# Altium PCB PCB_Smart_FAN_Controller_RevA.PcbDoc
Units mm, origin at the board's own origin, x right, y up, seen from the top; angles counter-clockwise.
Board outline 25 x 10 mm, 2 copper layers (Top Layer, Bottom Layer); 36 components, 25 nets, 107 pads, 52 vias.
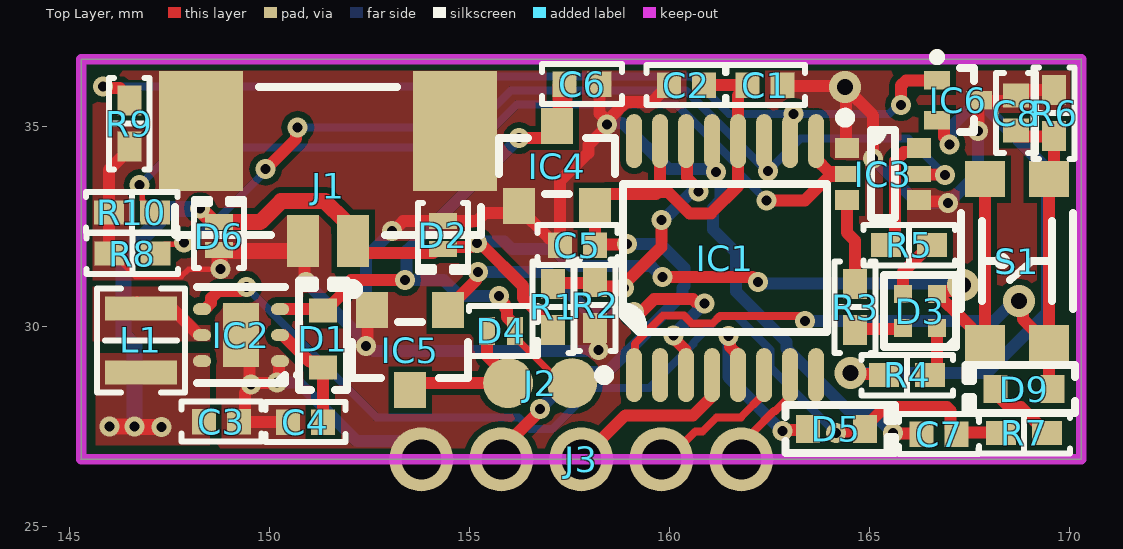
[diagram p0: Top Layer view]
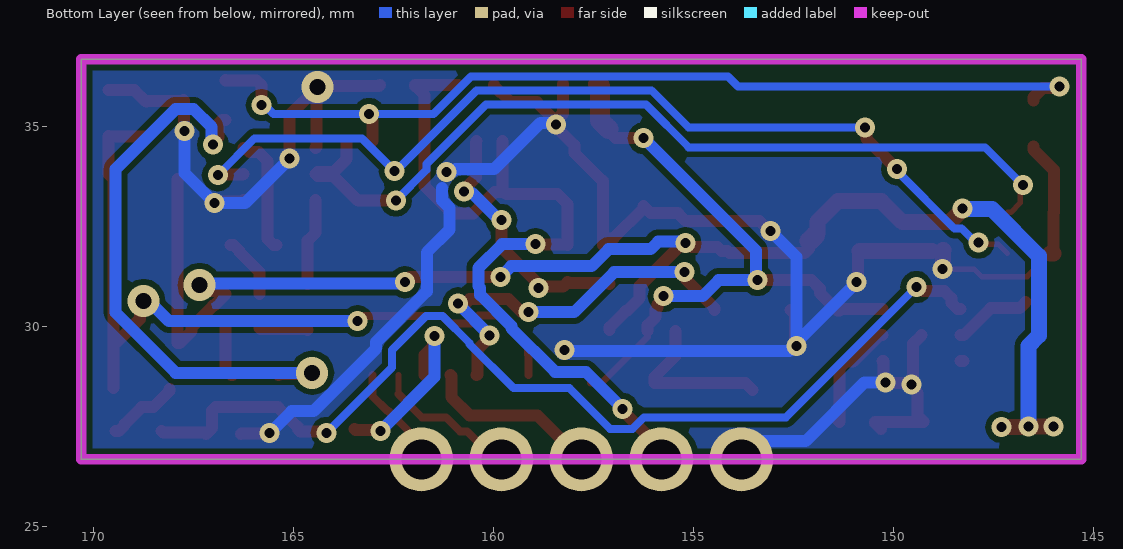
[diagram p1: Bottom Layer view, seen from below]

## Layer stack, top to bottom
Top Solder: solder mask 0.0102, Solder Resist, Dk 3.5
Top Layer: signal copper 0.0356
Dielectric 1: dielectric 0.32, FR-4, Dk 4.8
Bottom Layer: signal copper 0.0356
Bottom Solder: solder mask 0.0102, Solder Resist, Dk 3.5

## Board outline
145.307,26.67 170.307,26.67 170.307,36.67 145.307,36.67

## Design rules (kind name [scope] priority, off if disabled: settings)
Clearance [All] p1: gap=0.15 ignorepadtopadclearanceinfootprint=FALSE
ComponentClearance [All] p1: gap=0.15 collisioncheckmode=3 verticalgap=0.254 showdistances=FALSE
HoleToHoleClearance [All] p1: gap=0.2 allowstackedmicrovias=TRUE
MinimumSolderMaskSliver [All] p1: minsoldermaskwidth=0.1
PolygonConnect [All] p1: connectstyle=Direct reliefconductorwidth=0.254 reliefentries=4 polygonreliefangle="90 Angle" airgapwidth=0.254
RoutingVias [All] p1: holewidth=0.25 width=0.5 viastyle="Through Hole" minholewidth=0.25 minwidth=0.5 maxholewidth=2 maxwidth=3
SilkToSolderMaskClearance [IsPad] p1: minsilkscreentomaskgap=0 clearancetoexposedcopper=TRUE
SolderMaskExpansion [All] p1: expansion=0.102 istentingtop=FALSE
Width [All] p1: maxlimit=1 minlimit=0.135 preferedwidth=0.135
26 further rules are at their usual default settings.

## Classes and differential pairs
component class SCH5_Misc: C7 C8 D5 D9 J3 R6 R7 S1
component class SCH4_RGB_Indicator: D3 IC3 IC6 R3 R4 R5 R8 R9 R10
component class SCH3_Fan_Control: D4 IC5 J2
component class SCH2_Power: C3 C4 C5 C6 D1 D2 D6 IC2 IC4 J1 L1 R1 R2
component class SCH1_MCU: C1 C2 IC1

## Components (designator, comment, footprint, x,y, rotation, side; value= is the part's Value field where it differs from the comment)
C1 "0.1µF" "CAP 0402_1005" 162.4,36.025 r180 top
C2 "10000pF" "CAP 0402_1005" 160.435,36.025 r0 top
C3 "4.7µF" "CAP 0402_1005" 148.81,27.61 r180 top
C4 "4.7µF" "CAP 0402_1005" 150.91,27.6 r0 top
C5 "4.7µF" "CAP 0402_1005" 157.71,32.025 r0 top
C6 "1µF" "CAP 0402_1005" 157.825,36.05 r180 top
C7 "4.7µF" "CAP 0402_1005" 166.75,27.3 r0 top
C8 "0.1µF" "CAP 0402_1005" 168.675,35.325 r270 top
D1 "RBE05SM20AT2R" SOD-523 151.35,29.675 r90 top
D2 "DRTR5V0U1LPQ-7B" 0402 154.35,32.275 r270 top
D3 "Red, Green, Blue (RGB)" "Citizen CL-505S-X-SD-T" 166.275,30.375 r90 top
D4 "ESDSLC5V0L2B-TP" 0402 155.8,29.875 r0 top
D5 "RBE05SM20AT2R" SOD-523 164.185,27.425 r0 top
D6 "DRTR5V0U1LPQ-7B" 0402 148.75,32.25 r90 top
D9 "RBE05SM20AT2R" SOD-523 168.875,28.425 r180 top
IC1 "LPC802M011JDH20FP" "NXP TSSOP-16" 161.4,31.7 r90 top
IC2 "TPS61240IDRVRQ1" "TI WSON-6 DRV0006D 2x2MM" 149.3,29.775 r180 top
IC3 "2N7002BKS,115" "NXP SOT-363" 165.35,33.8 r0 top
IC4 "AP7313-33SRG-7" "DIODES SOT-23-3" 157.2,34 r90 top
IC5 "DMN1019USN-13" "DIODES SOT-23-3" 153.525,29.4 r270 top
IC6 "RE1C002UNTCL" "ROHM SC-89-SOT-490" 167.225,35.65 r0 top
J1 "BM02B-SRSS-TB(LF)(SN)" MOLX-53398-0271_V 151.475,33.5 r180 top
J2 "FAN" "FAN Connections" 157.575,28.575 r180 top
J3 "5 Cascalated Holes" "Cascalated Holes" 162.887,26.67 r180 top
L1 "1.5µH" "IND 0806_2016" 146.793,29.644 r90 top
R1 "33 kOhms" "RES 0402_1005" 157.1,30.475 r270 top
R2 "1 MOhms" "RES 0402_1005" 158.15,30.525 r90 top
R3 "240 Ohms" "RES 0402_1005" 164.65,30.475 r270 top
R4 "200 Ohms" "RES 0402_1005" 165.95,28.775 r0 top
R5 "200 Ohms" "RES 0402_1005" 166,32.025 r0 top
R6 "20 kOhms" "RES 0402_1005" 169.625,35.325 r270 top
R7 "200 kOhms" "RES 0402_1005" 168.875,27.325 r180 top
R8 "10 kOhms" "RES 0402_1005" 146.581,31.815 r0 top
R9 "10 kOhms" "RES 0402_1005" 146.507,35.065 r90 top
R10 "10 kOhms" "RES 0402_1005" 146.571,32.846 r0 top
S1 "KMR741NG ULC LFS" "C&K KMR7" 168.7,31.625 r90 top

## Footprints (in the part's own frame and the unit in brackets; to place one, negate y for a bottom-side part, rotate by r counter-clockwise, add the part's x,y. Pads: shape width x height; smd on the part's side, far side on the other; paste and mask are expansions set on the pad)
0402 [mm] "SODFL, 2-Leads, Body 0.675x1.075mm, IPC Medium Density"
  rect 0.4x0.7 smd: 1(-0.35,0) 2(0.35,0)
  silkscreen extent -0.8,-0.63 0.92,0.63, body extent -0.51,-0.31 0.5,0.3, height 0.45
"C&K KMR7" [mm] "T-Switch, 4-leads, body 4.2x2.8mm, C&K KMR741NG ULC LFS"
  rect 0.9x1 smd mask+0.1: 1(-2.05,0.8) 2(2.05,0.8) 3(-2.05,-0.8) 4(2.05,-0.8)
  silkscreen extent -1.2,-1.4 1.2,1.4, body extent -2.3,-1.4 2.3,1.4, height 2.5
"CAP 0402_1005" [mm] "Chip Capacitor, 2-Leads, Body 1.02x0.51mm, IPC Medium Density"
  rect 0.6x0.64 smd: 1(-0.44,0) 2(0.44,0)
  silkscreen extent -1,-0.5 1,0.5, body extent -0.5,-0.26 0.5,0.26, height 0.52
"Cascalated Holes" [mm] "Plated Through Hole: Hole Dia.=1.2mm Pad Dia.=2.0mm"
  round 1.6 hole 1: 1(1.08,0) 2(3.08,0) 3(5.08,0) 4(7.08,0) 5(9.08,0)
"Citizen CL-505S-X-SD-T" [mm] "4-Leads, Body 1.0x1.0mm"
  rect 0.45x0.45 smd mask+0: 1(-0.425,-0.425) 3(0.425,0.425)
  rect 0.45x0.45 smd paste+0 mask+0: 2(-0.425,0.425) 4(0.425,-0.425)
  silkscreen extent -0.9,-0.9 0.9,0.9, body extent -0.5,-0.5 0.5,0.5, height 0.26
"DIODES SOT-23-3" [mm] "SOT23, 3-Leads, Body 2.90x2.40mm, Pitch 0.95mm, IPC Medium Density"
  rect 0.9x0.8 smd: 1(-1,0.95) 2(-1,-0.95) 3(1,0)
  silkscreen extent -0.7,-1.45 0.7,1.45, body extent -1.41,-1.45 1.41,1.45, height 1.5
"FAN Connections" [mm]
  round 1.25 smd: 1(0,0) 2(1.6,0)
"IND 0806_2016" [mm] "Chip Capacitor, 2-Leads, Body 2.00x1.20mm, IPC Medium Density"
  rect 0.6x1.8 smd: 1(-0.8,0) 2(0.8,0)
  silkscreen extent -1.3,-1.1 1.3,1.1, body extent -1.01,-0.91 1.01,0.91, height 1.81
MOLX-53398-0271_V [mm] "Header, 2-Leads, Body 7.65x3.7mm, Pitch 1.25mm"
  rect 0.8x1.3 smd: 1(-0.625,1.375) 2(0.625,1.375)
  rect 2.1x3 smd: MP1(-3.175,-1.375) MP2(3.175,-1.375)
  silkscreen extent -3.82,-2.47 3.83,2.7, body extent -3.82,-2.49 3.83,1.71, height 4.72
"NXP SOT-363" [mm] "SOT363, 6-Leads, Body 2.00x2.10mm, Pitch 0.65mm, IPC Medium Density"
  rect 0.6x0.5 smd: 1(-0.9,0.65) 3(-0.9,-0.65) 4(0.9,-0.65) 6(0.9,0.65)
  rect 0.6x0.4 smd: 2(-0.9,0) 5(0.9,0)
  silkscreen extent -1.07,-1.1 0.3,1.53, body extent -1.06,-1.1 1.06,1.1, height 1.05
"NXP TSSOP-16" [mm] "TSSOP, 16-Leads, Body 5.00x4.40mm, Pitch 0.65mm, IPC Medium Density"
  oval 1.35x0.4 smd: 1(-2.925,2.275) 2(-2.925,1.625) 3(-2.925,0.975) 4(-2.925,0.325) 5(-2.925,-0.325) 6(-2.925,-0.975) 7(-2.925,-1.625) 8(-2.925,-2.275) 9(2.925,-2.275) 10(2.925,-1.625) 11(2.925,-0.975) 12(2.925,-0.325) 13(2.925,0.325) 14(2.925,0.975) 15(2.925,1.625) 16(2.925,2.275)
  silkscreen extent -3.05,-2.55 1.85,3.15, body extent -3.21,-2.5 3.21,2.5, height 1.1
"RES 0402_1005" [mm] "Chip Resistor, 2-Leads, Body 1.0x0.5mm, IPC Medium Density"
  rect 0.75x0.6 smd: 1(-0.575,0) 2(0.575,0)
  silkscreen extent -1.14,-0.51 1.14,0.51, body extent -0.5,-0.25 0.5,0.25, height 0.35
"ROHM SC-89-SOT-490" [mm] "SC-89(SOT-490), 3-Leads, Body 0.8x1.60mm, Pitch 0.50mm, IPC Medium Density"
  rect 0.65x0.46 smd: 1(-0.525,0.5) 2(0.525,0) 3(-0.525,-0.5)
  silkscreen extent -0.62,-0.8 0.4,1.17, body extent -0.8,-0.8 0.8,0.8, height 0.85
SOD-523 [mm] "Molded Diode, 2-Leads, Body 1.60x0.80mm, IPC Medium Density"
  rect 0.6x0.7 smd: 1(-0.71,0) 2(0.71,0)
  silkscreen extent -1.27,-0.6 1.47,0.6, body extent -0.8,-0.4 0.8,0.4, height 0.82
"TI WSON-6 DRV0006D 2x2MM" [mm] "SON, 6-Leads, Body 2.00x2.00mm, Pitch 0.65mm, Thermal Pad 1.60x0.89mm, IPC Medium Density"
  oval 0.45x0.3 smd: 1(-0.975,0.65) 2(-0.975,0) 3(-0.975,-0.65) 4(0.975,-0.65) 5(0.975,0) 6(0.975,0.65)
  rect 0.89x1.6 smd: 7(0,0)
  silkscreen extent -1.45,-1.2 1.1,1.2, body extent -1.05,-1.05 1.05,1.05, height 0.8

## Part data
C1 C8: library part CC0402KRX5R8BB104, "CAP CER 0.1UF 25V X5R 0402", Device Package="0402 (1005 Metric)", Manufacturer=Yageo, Operating Temperature="-55°C ~ 85°C", Supplier Part Number 1=311-1697-1-ND, Temperature Coefficient=X5R, Tolerance=±10%, Voltage - Rated=25V, Applications="General Purpose", Capacitance=0.1µF, ComponentLink1Description=Datasheet, ComponentLink1URL=https://www.yageo.com/upload/media/product/productsearch/datasheet/mlcc/UPY-GPHC_X5R_4V-to-50V_25.pdf, ComponentLink2Description="DigiKey Link", ComponentLink2URL=http://digikey.com/product-detail/en/yageo/CC0402KRX5R8BB104/311-1697-1-ND/5195599, LastUpdated="9/2/2020 1:01:34 AM", Lifecycle Status=Active, Minimum Order=1, Mounting Type="Surface Mount, MLCC", Package / Case="0402 (1005 Metric)", Packaging=TapeAndReel, Part Number=CC0402KRX5R8BB104, Part Status=Active, PartId=12727, Price=0.01, Series=CC, Size / Dimension="0.039\" L x 0.020\" W (1.00mm x 0.50mm)", Supplier 1=DigiKey, Thickness (Max)="0.022\" (0.55mm)"
C2: library part CGA2B2X5R1E103M050BA, "CAP CER 10000PF 25V X5R 0402", Device Package="0402 (1005 Metric)", Manufacturer="TDK Corporation", Operating Temperature="-55°C ~ 85°C", Ratings=AEC-Q200, Supplier Part Number 1=445-12174-1-ND, Temperature Coefficient=X5R, Tolerance=±20%, Voltage - Rated=25V, Applications=Automotive, Capacitance=10000pF, ComponentLink1Description=Datasheet, ComponentLink1URL=https://product.tdk.com/info/en/catalog/datasheets/mlcc_automotive_general_en.pdf?ref_disty=digikey, ComponentLink2Description="DigiKey Link", ComponentLink2URL=http://digikey.com/product-detail/en/tdk-corporation/CGA2B2X5R1E103M050BA/445-12174-1-ND/3953840, LastUpdated="9/2/2020 1:02:10 AM", Lifecycle Status=Active, Minimum Order=1, Mounting Type="Surface Mount, MLCC", Package / Case="0402 (1005 Metric)", Packaging=TapeAndReel, Part Number=CGA2B2X5R1E103M050BA, Part Status=Active, PartId=8092, Price=0.01, Series=CGA, Size / Dimension="0.039\" L x 0.020\" W (1.00mm x 0.50mm)", Supplier 1=DigiKey, Thickness (Max)="0.022\" (0.55mm)"
C3 C4 C5 C7: library part C1005X5R1A475K050BC, "CAP CER 4.7UF 10V X5R 0402", Device Package="0402 (1005 Metric)", Manufacturer="TDK Corporation", Operating Temperature="-55°C ~ 85°C", Supplier Part Number 1=445-13820-1-ND, Temperature Coefficient=X5R, Tolerance=±10%, Voltage - Rated=10V, Applications="General Purpose", Capacitance=4.7µF, ComponentLink1Description=Datasheet, ComponentLink1URL=https://product.tdk.com/info/en/catalog/datasheets/mlcc_commercial_general_en.pdf?ref_disty=digikey, ComponentLink2Description="DigiKey Link", ComponentLink2URL=http://digikey.com/product-detail/en/tdk-corporation/C1005X5R1A475K050BC/445-13820-1-ND/3955486, Features="Low ESL", LastUpdated="9/2/2020 1:02:25 AM", Lifecycle Status=Active, Minimum Order=1, Mounting Type="Surface Mount, MLCC", Package / Case="0402 (1005 Metric)", Packaging=TapeAndReel, Part Number=C1005X5R1A475K050BC, Part Status=Active, PartId=1759, Price=0.10, Series=C, Size / Dimension="0.039\" L x 0.020\" W (1.00mm x 0.50mm)", Supplier 1=DigiKey, Thickness (Max)="0.022\" (0.55mm)"
C6: library part JMK105C6105KV-F, "CAP CER 1UF 6.3V X6S 0402", Device Package="0402 (1005 Metric)", Manufacturer="Taiyo Yuden", Operating Temperature="-55°C ~ 105°C", Supplier Part Number 1=587-3381-1-ND, Temperature Coefficient=X6S, Tolerance=±10%, Voltage - Rated=6.3V, Applications="General Purpose", Capacitance=1µF, ComponentLink1Description=Datasheet, ComponentLink1URL=https://www.yuden.co.jp/productdata/catalog/mlcc01_e.pdf, ComponentLink2Description="DigiKey Link", ComponentLink2URL=http://digikey.com/product-detail/en/taiyo-yuden/JMK105C6105KV-F/587-3381-1-ND/4157200, LastUpdated="9/2/2020 1:01:39 AM", Lifecycle Status=Active, Minimum Order=1, Mounting Type="Surface Mount, MLCC", Package / Case="0402 (1005 Metric)", Packaging=TapeAndReel, Part Number=JMK105C6105KV-F, Part Status=Active, PartId=12563, Price=0.01, Series=M, Size / Dimension="0.039\" L x 0.020\" W (1.00mm x 0.50mm)", Supplier 1=DigiKey, Thickness (Max)="0.022\" (0.55mm)"
D1 D5 D9: "DIODE SCHOTTKY 20V 500MA EMD2", Current - Average Rectified (Io)=500mA, Current - Reverse Leakage @ Vr="150µA @ 20V", Manufacturer="Rohm Semiconductor", Operating Temperature - Junction="150°C (Max)", Package / Case="SC-79, SOD-523", Supplier Device Package=EMD2, Supplier Part Number 1=RBE05SM20AT2RTR-ND, Voltage - DC Reverse (Vr) (Max)=20V, Voltage - Forward (Vf) (Max) @ If="530mV @ 500mA", ComponentLink1Description=Datasheet, ComponentLink1URL=https://www.rohm.com/datasheet/RBE05SM20A/rbe05sm20at2r-e, ComponentLink2Description="DigiKey Link", ComponentLink2URL=http://digikey.com/product-detail/en/rohm-semiconductor/RBE05SM20AT2R/RBE05SM20AT2RTR-ND/5721257, Diode Type=Schottky, LastUpdated="9/2/2020 1:23:19 AM", Lifecycle Status=Active, Minimum Order=0, Mounting Type="Surface Mount", Packaging=TapeAndReel, Part Number=RBE05SM20AT2R, Part Status=Active, PartId=2802, Price=0.05, Series=-, Speed="Fast Recovery =< 500ns, > 200mA (Io)", Supplier 1=DigiKey
D2 D6: "DATALINE PROTECT PP X1-DFN1006-2", Capacitance @ Frequency="1pF @ 1MHz", Current - Peak Pulse (10/1000µs)="5A (8/20µs)", Device Package="0402 (1006 Metric)", Manufacturer="Diodes Incorporated", Operating Temperature="-55°C ~ 150°C (TJ)", Power Line Protection=No, Supplier Device Package=X1-DFN1006-2, Supplier Part Number 1=31-DRTR5V0U1LPQ-7BCT-ND, Voltage - Breakdown (Min)=6V, Voltage - Clamping (Max) @ Ipp=10V, Voltage - Reverse Standoff (Typ)="5.5V (Max)", Applications=Automotive, ComponentLink1Description=Datasheet, ComponentLink1URL=https://www.diodes.com/assets/Datasheets/DRTR5V0U1LPQ.pdf, ComponentLink2Description="DigiKey Link", ComponentLink2URL=http://digikey.com/product-detail/en/diodes-incorporated/DRTR5V0U1LPQ-7B/31-DRTR5V0U1LPQ-7BCT-ND/10674185, LastUpdated="9/2/2020 1:28:45 AM", Lifecycle Status=Active, Minimum Order=1, Mounting Type="Surface Mount", Package / Case="0402 (1006 Metric)", Packaging=Unknown, Part Number=DRTR5V0U1LPQ-7B, Part Status=Active, PartId=10375, Price=0.04, Series="Automotive, AEC-Q101", Supplier 1=DigiKey, Type=Zener, Unidirectional Channels=1
D3: library part CL-505S-X-SD-T, "LED TRI TOP FIRING 1.0 X 1.0", Current - Test="5mA Red, 5mA Green, 5mA Blue", Device Package="0404 (1010 Metric)", Lens Color=0.26mm, Manufacturer=Citizen, Millicandela Rating="40mcd Red, 220mcd Green, 65mcd Blue", Supplier Part Number 1=1642-1510-1-ND, Voltage - Forward (Vf) (Typ)="1.85V Red, 2.7V Green, 2.75V Blue", Color="Red, Green, Blue (RGB)", ComponentLink1Description=Datasheet, ComponentLink1URL=http://ce.citizen.co.jp/up_img/product/sQNrj4RlM7o2/CL-505S_e.pdf, ComponentLink2Description="DigiKey Link", ComponentLink2URL=http://digikey.com/product-detail/en/citizen/CL-505S-X-SD-T/1642-1510-1-ND/6005950, Configuration="Common Anode", Height (Max)=0.26mm, LastUpdated="3/19/2020 10:25:23 PM", Lens Size=1.00mm, Lens Style="Square with Flat Top", Lifecycle Status=Active, Minimum Order=1, Mounting Type="Surface Mount", Package / Case="0404 (1010 Metric)", Packaging=TapeAndReel, Part Number=CL-505S-X-SD-T, Part Status=Active, PartId=955, Price=0.23, Series=CL-505S, Size / Dimension="1.00mm L x 1.00mm W", Supplier 1=DigiKey, Wavelength - Dominant="615nm Red, 530nm Green, 470nm Blue"
D4: "5.5V, ESD PROTECTION DEVICES, DF", Capacitance @ Frequency="0.15pF @ 1MHz", Current - Peak Pulse (10/1000µs)="3A (8/20µs)", Manufacturer="Micro Commercial Co", Operating Temperature="-55°C ~ 150°C (TJ)", Package / Case="0402 (1006 Metric)", Power - Peak Pulse=40W, Power Line Protection=No, Supplier Device Package=DFN1006-2L, Supplier Part Number 1=353-ESDSLC5V0L2B-TPCT-ND, Voltage - Breakdown (Min)=6.5V, Voltage - Clamping (Max) @ Ipp=15V, Voltage - Reverse Standoff (Typ)="5.5V (Max)", Applications="General Purpose", Bidirectional Channels=1, ComponentLink1Description=Datasheet, ComponentLink1URL=https://mccsemi.com/pdf/Products/ESDSLC5V0L2B(DFN1006-2L)-V1.pdf, ComponentLink2Description="DigiKey Link", ComponentLink2URL=http://digikey.com/product-detail/en/micro-commercial-co/ESDSLC5V0L2B-TP/353-ESDSLC5V0L2B-TPCT-ND/12177299, LastUpdated="8/30/2020 9:08:11 PM", Lifecycle Status=Active, Minimum Order=1, Mounting Type="Surface Mount", Packaging=Unknown, Part Number=ESDSLC5V0L2B-TP, PartId=11464, Price=0.03, Supplier 1=DigiKey, Type=Zener
IC1: library part "NXP LPC802 16PIN", "Integrated CIrcuit", Price=1.45
IC2: "IC REG BOOST 5V 500MA 6SON", Current - Output="500mA (Switch)", Frequency - Switching=3.5MHz, Manufacturer="Texas Instruments", Operating Temperature="-40°C ~ 85°C (TA)", Package / Case="6-WDFN Exposed Pad", Supplier Device Package="6-SON (2x2)", Supplier Part Number 1=296-28184-1-ND, Voltage - Input (Max)=5.5V, Voltage - Input (Min)=2.3V, Voltage - Output (Min/Fixed)=5V, ComponentLink1Description=Datasheet, ComponentLink1URL=http://www.ti.com/general/docs/suppproductinfo.tsp?distId=10&gotoUrl=http%3A%2F%2Fwww.ti.com%2Flit%2Fgpn%2Ftps61240-q1, ComponentLink2Description="DigiKey Link", ComponentLink2URL=http://digikey.com/product-detail/en/texas-instruments/TPS61240IDRVRQ1/296-28184-1-ND/2522312, Function=Step-Up, LastUpdated="9/13/2020 11:04:11 AM", Lifecycle Status=Active, Minimum Order=1, Mounting Type="Surface Mount", Number of Outputs=1, Output Configuration=Positive, Output Type=Fixed, Packaging=TapeAndReel, Part Number=TPS61240IDRVRQ1, Part Status=Active, Price=0.73, Series="Automotive, AEC-Q100", Supplier 1=DigiKey, Synchronous Rectifier=Yes, Topology=Boost
IC3: "MOSFET 2N-CH 60V 0.3A 6TSSOP", Current - Continuous Drain (Id) @ 25°C=300mA, Drain to Source Voltage (Vdss)=60V, Input Capacitance (Ciss) (Max) @ Vds="50pF @ 10V", Manufacturer="Nexperia USA Inc.", Operating Temperature="150°C (TJ)", Package / Case="6-TSSOP, SC-88, SOT-363", Power - Max=295mW, Supplier Device Package=6-TSSOP, Supplier Part Number 1=1727-4786-1-ND, ComponentLink1Description=Datasheet, ComponentLink1URL=https://assets.nexperia.com/documents/data-sheet/2N7002BKS.pdf, ComponentLink2Description="DigiKey Link", ComponentLink2URL=http://digikey.com/product-detail/en/nexperia-usa-inc/2N7002BKS115/1727-4786-1-ND/2531264, FET Feature="Logic Level Gate", FET Type="2 N-Channel (Dual)", Gate Charge (Qg) (Max) @ Vgs="0.6nC @ 4.5V", LastUpdated="9/2/2020 1:29:59 AM", Lifecycle Status=Active, Minimum Order=1, Mounting Type="Surface Mount", Packaging=TapeAndReel, Part Number=2N7002BKS,115, Part Status=Active, Price=0.08, Rds On (Max) @ Id, Vgs="1.6Ohm @ 500mA, 10V", Series="Automotive, AEC-Q101, TrenchMOS™", Supplier 1=DigiKey, Vgs(th) (Max) @ Id="2.1V @ 250µA"
IC4: "IC REG LIN 3.3V 150MA SOT23R-3", Current - Output=150mA, Current - Quiescent (Iq)=75µA, Current - Supply (Max)=85µA, Manufacturer="Diodes Incorporated", Operating Temperature="-40°C ~ 85°C", Package / Case="TO-236-3, SC-59, SOT-23-3", Supplier Device Package=SOT-23R-3, Supplier Part Number 1=AP7313-33SRG-7DICT-ND, Voltage - Input (Max)=6V, Voltage - Output (Min/Fixed)=3.3V, Voltage Dropout (Max)="0.3V @ 150mA", ComponentLink1Description=Datasheet, ComponentLink1URL=https://www.diodes.com/assets/Datasheets/AP7313.pdf, ComponentLink2Description="DigiKey Link", ComponentLink2URL=http://digikey.com/product-detail/en/diodes-incorporated/AP7313-33SRG-7/AP7313-33SRG-7DICT-ND/2270841, LastUpdated="9/2/2020 1:24:50 AM", Lifecycle Status=Active, Minimum Order=1, Mounting Type="Surface Mount", Number of Regulators=1, Output Configuration=Positive, Output Type=Fixed, Packaging=TapeAndReel, Part Number=AP7313-33SRG-7, Part Status=Active, Price=0.09, Protection Features="Over Current, Over Temperature, Short Circuit", PSRR="65dB (100Hz)", Series=-, Supplier 1=DigiKey
IC5: "MOSFET N-CH 12V 9.3A SC59", Current - Continuous Drain (Id) @ 25°C="9.3A (Ta)", Drain to Source Voltage (Vdss)=12V, Drive Voltage (Max Rds On,  Min Rds On)="1.2V, 2.5V", Input Capacitance (Ciss) (Max) @ Vds="2426pF @ 10V", Manufacturer="Diodes Incorporated", Operating Temperature="-55°C ~ 150°C (TJ)", Package / Case="TO-236-3, SC-59, SOT-23-3", Power Dissipation (Max)="680mW (Ta)", Supplier Device Package=SC-59, Supplier Part Number 1=DMN1019USN-13DICT-ND, ComponentLink1Description=Datasheet, ComponentLink1URL=https://www.diodes.com/assets/Datasheets/DMN1019USN.pdf, ComponentLink2Description="DigiKey Link", ComponentLink2URL=http://digikey.com/product-detail/en/diodes-incorporated/DMN1019USN-13/DMN1019USN-13DICT-ND/4898885, FET Type=N-Channel, Gate Charge (Qg) (Max) @ Vgs="50.6nC @ 8V", LastUpdated="9/2/2020 1:25:02 AM", Lifecycle Status=Active, Minimum Order=1, Mounting Type="Surface Mount", Packaging=TapeAndReel, Part Number=DMN1019USN-13, Part Status=Active, Price=0.10, Rds On (Max) @ Id, Vgs="10mOhm @ 9.7A, 4.5V", Series=-, Supplier 1=DigiKey, Technology="MOSFET (Metal Oxide)", Vgs (Max)=±8V, Vgs(th) (Max) @ Id="800mV @ 250µA"
IC6: "MOSFET N-CH 20V 0.2A EMT3", Current - Continuous Drain (Id) @ 25°C="200mA (Ta)", Drain to Source Voltage (Vdss)=20V, Drive Voltage (Max Rds On,  Min Rds On)="1.2V, 2.5V", Input Capacitance (Ciss) (Max) @ Vds="25pF @ 10V", Manufacturer="Rohm Semiconductor", Operating Temperature="150°C (TJ)", Package / Case="SC-89, SOT-490", Power Dissipation (Max)="150mW (Ta)", Supplier Device Package="EMT3F (SOT-416FL)", Supplier Part Number 1=RE1C002UNTCLCT-ND, ComponentLink1Description=Datasheet, ComponentLink1URL=https://www.rohm.com/datasheet/RE1C002UN/re1c002untcl-e, ComponentLink2Description="DigiKey Link", ComponentLink2URL=http://digikey.com/product-detail/en/rohm-semiconductor/RE1C002UNTCL/RE1C002UNTCLCT-ND/5042535, FET Type=N-Channel, LastUpdated="9/2/2020 1:30:13 AM", Lifecycle Status=Active, Minimum Order=1, Mounting Type="Surface Mount", Packaging=TapeAndReel, Part Number=RE1C002UNTCL, Part Status=Active, Price=0.03, Rds On (Max) @ Id, Vgs="1.2Ohm @ 100mA, 2.5V", Series=-, Supplier 1=DigiKey, Technology="MOSFET (Metal Oxide)", Vgs (Max)=±8V, Vgs(th) (Max) @ Id="1V @ 1mA"
J1: "CONN HEADER SMD 2POS 1MM", Current Rating (Amps)=0.7A, Insulation Color=Natural, Manufacturer="JST Sales America Inc.", Material Flammability Rating="UL94 V-0", Operating Temperature="-25°C ~ 85°C", Supplier Part Number 1=455-1788-1-ND, Voltage Rating=50V, ComponentLink1Description=Datasheet, ComponentLink1URL=http://www.jst-mfg.com/product/pdf/eng/eSR.pdf, ComponentLink2Description="DigiKey Link", ComponentLink2URL=http://digikey.com/product-detail/en/jst-sales-america-inc/BM02B-SRSS-TB-LF-SN/455-1788-1-ND/926859, Connector Type=Header, Contact Finish - Mating=Tin, Contact Finish - Post=Tin, Contact Material="Copper Alloy", Contact Shape=Square, Contact Type="Male Pin", Fastening Type=Push-Pull, Features="Solder Retention", Insulation Height="0.167\" (4.25mm)", Insulation Material="Polyamide (PA), Nylon", LastUpdated="1/12/2020 10:11:04 PM", Lifecycle Status=Active, Minimum Order=1, Mounting Type="Surface Mount", Number of Positions=2, Number of Positions Loaded=All, Number of Rows=1, Packaging=TapeAndReel, Part Number=BM02B-SRSS-TB(LF)(SN), Part Status=Active, PartId=12, Pitch - Mating="0.039\" (1.00mm)", Price=0.22, Series=SR, Shrouding="Shrouded - 4 Wall", Style="Board to Cable/Wire", Supplier 1=DigiKey, Termination=Solder
J2: library part "FAN Connection", "Fan Connection Test Points", LatestRevisionDate=17-Jul-2002, LatestRevisionNote="Re-released for DXP Platform.", Publisher="Altium Limited"
J3: library part "Cascalated Holes", LatestRevisionDate=17-Jul-2002, LatestRevisionNote="Re-released for DXP Platform.", Publisher="Altium Limited"
L1: library part LQH2MCN1R5M52L, "FIXED IND 1.5UH 540MA 330 MOHM", Current Rating (Amps)=540mA, DC Resistance (DCR)="429mOhm Max", Device Package="0806 (2016 Metric)", Frequency - Self Resonant=165MHz, Inductance Frequency - Test=1MHz, Manufacturer="Murata Electronics", Operating Temperature="-40°C ~ 85°C", Supplier Part Number 1=490-4985-1-ND, Tolerance=±20%, ComponentLink1Description=Datasheet, ComponentLink1URL=https://search.murata.co.jp/Ceramy/image/img/P02/JELF243A-0060.pdf, ComponentLink2Description="DigiKey Link", ComponentLink2URL=http://digikey.com/product-detail/en/murata-electronics/LQH2MCN1R5M52L/490-4985-1-ND/1788283, Height - Seated (Max)="0.037\" (0.95mm)", Inductance=1.5µH, LastUpdated="9/2/2020 1:24:34 AM", Lifecycle Status=Active, Material - Core=Ferrite, Minimum Order=1, Mounting Type="Surface Mount", Package / Case="0806 (2016 Metric)", Packaging=TapeAndReel, Part Number=LQH2MCN1R5M52L, Part Status=Active, PartId=3084, Price=0.14, Series=LQH2, Shielding=Unshielded, Size / Dimension="0.079\" L x 0.063\" W (2.00mm x 1.60mm)", Supplier 1=DigiKey, Supplier Device Package="0806 (2016 Metric)", Type=Wirewound
R1: library part RR0510P-333-D, "RES SMD 33K OHM 0.5% 1/16W 0402", Device Package="0402 (1005 Metric)", Manufacturer=Susumu, Operating Temperature="-55°C ~ 125°C", Power (Watts)="0.063W, 1/16W", Supplier Part Number 1=RR05P33.0KDCT-ND, Temperature Coefficient=±25ppm/°C, Tolerance=±0.5%, ComponentLink1Description=Datasheet, ComponentLink1URL=http://www.susumu.co.jp/common/pdf/n_catalog_partition05_en.pdf, ComponentLink2Description="DigiKey Link", ComponentLink2URL=http://digikey.com/product-detail/en/susumu/RR0510P-333-D/RR05P33.0KDCT-ND/432971, Composition="Thin Film", Height - Seated (Max)="0.016\" (0.40mm)", LastUpdated="9/2/2020 1:08:09 AM", Lifecycle Status=Active, Minimum Order=1, Number of Terminations=2, Package / Case="0402 (1005 Metric)", Packaging=TapeAndReel, Part Number=RR0510P-333-D, Part Status=Active, PartId=3295, Price=0.01, Resistance="33 kOhms", Series=RR, Size / Dimension="0.039\" L x 0.020\" W (1.00mm x 0.50mm)", Supplier 1=DigiKey
R2: library part CRCW04021M00FKTD, "RES SMD 1M OHM 1% 1/16W 0402", Device Package="0402 (1005 Metric)", Manufacturer="Vishay Dale", Operating Temperature="-55°C ~ 155°C", Power (Watts)="0.063W, 1/16W", Ratings=AEC-Q200, Supplier Device Package=0402, Supplier Part Number 1=541-CRCW04021M00FKTDCT-ND, Temperature Coefficient=±100ppm/°C, Tolerance=±1%, ComponentLink1Description=Datasheet, ComponentLink1URL=http://www.vishay.com/docs/20008/dcrcw.pdf, ComponentLink2Description="DigiKey Link", ComponentLink2URL=http://digikey.com/product-detail/en/vishay-dale/CRCW04021M00FKTD/541-CRCW04021M00FKTDCT-ND/11500836, Composition="Thick Film", Features="Automotive AEC-Q200", LastUpdated="9/2/2020 1:07:22 AM", Lifecycle Status=Active, Minimum Order=1, Number of Terminations=2, Package / Case="0402 (1005 Metric)", Packaging=TapeAndReel, Part Number=CRCW04021M00FKTD, PartId=56877, Price=0.01, Resistance="1 MOhms", Series=CRCW, Supplier 1=DigiKey
R3: library part RR0510P-241-D, "RES SMD 240 OHM 0.5% 1/16W 0402", Device Package="0402 (1005 Metric)", Manufacturer=Susumu, Operating Temperature="-55°C ~ 125°C", Power (Watts)="0.063W, 1/16W", Supplier Part Number 1=RR05P240DCT-ND, Temperature Coefficient=±25ppm/°C, Tolerance=±0.5%, ComponentLink1Description=Datasheet, ComponentLink1URL=http://www.susumu.co.jp/common/pdf/n_catalog_partition05_en.pdf, ComponentLink2Description="DigiKey Link", ComponentLink2URL=http://digikey.com/product-detail/en/susumu/RR0510P-241-D/RR05P240DCT-ND/432922, Composition="Thin Film", Height - Seated (Max)="0.016\" (0.40mm)", LastUpdated="9/2/2020 1:08:09 AM", Lifecycle Status=Active, Minimum Order=1, Number of Terminations=2, Package / Case="0402 (1005 Metric)", Packaging=TapeAndReel, Part Number=RR0510P-241-D, Part Status=Active, PartId=3287, Price=0.01, Resistance="240 Ohms", Series=RR, Size / Dimension="0.039\" L x 0.020\" W (1.00mm x 0.50mm)", Supplier 1=DigiKey
R4 R5: library part RR0510P-201-D, "RES SMD 200 OHM 0.5% 1/16W 0402", Device Package="0402 (1005 Metric)", Manufacturer=Susumu, Operating Temperature="-55°C ~ 125°C", Power (Watts)="0.063W, 1/16W", Supplier Part Number 1=RR05P200DCT-ND, Temperature Coefficient=±25ppm/°C, Tolerance=±0.5%, ComponentLink1Description=Datasheet, ComponentLink1URL=http://www.susumu.co.jp/common/pdf/n_catalog_partition05_en.pdf, ComponentLink2Description="DigiKey Link", ComponentLink2URL=http://digikey.com/product-detail/en/susumu/RR0510P-201-D/RR05P200DCT-ND/432920, Composition="Thin Film", Height - Seated (Max)="0.016\" (0.40mm)", LastUpdated="9/2/2020 1:08:09 AM", Lifecycle Status=Active, Minimum Order=1, Number of Terminations=2, Package / Case="0402 (1005 Metric)", Packaging=TapeAndReel, Part Number=RR0510P-201-D, Part Status=Active, PartId=3269, Price=0.01, Resistance="200 Ohms", Series=RR, Size / Dimension="0.039\" L x 0.020\" W (1.00mm x 0.50mm)", Supplier 1=DigiKey
R6: library part RG1005P-203-D-T10, "RES SMD 20K OHM 0.5% 1/16W 0402", Device Package="0402 (1005 Metric)", Manufacturer=Susumu, Operating Temperature="-55°C ~ 155°C", Power (Watts)="0.063W, 1/16W", Ratings=AEC-Q200, Supplier Device Package=0402, Supplier Part Number 1=408-1674-1-ND, Temperature Coefficient=±25ppm/°C, Tolerance=±0.5%, ComponentLink1Description=Datasheet, ComponentLink1URL=http://www.susumu.co.jp/common/pdf/n_catalog_partition01_en.pdf, ComponentLink2Description="DigiKey Link", ComponentLink2URL=http://digikey.com/product-detail/en/susumu/RG1005P-203-D-T10/408-1674-1-ND/1288043, Composition="Thin Film", Features="Anti-Sulfur, Automotive AEC-Q200", Height - Seated (Max)="0.016\" (0.40mm)", LastUpdated="9/2/2020 1:07:34 AM", Lifecycle Status=Active, Minimum Order=1, Number of Terminations=2, Package / Case="0402 (1005 Metric)", Packaging=TapeAndReel, Part Number=RG1005P-203-D-T10, Part Status=Active, PartId=18569, Price=0.01, Resistance="20 kOhms", Series=RG, Size / Dimension="0.039\" L x 0.020\" W (1.00mm x 0.50mm)", Supplier 1=DigiKey
R7: library part ERJ-PA2J204X, "RES SMD 200 KOHM 5% 1/5W 0402", Device Package="0402 (1005 Metric)", Manufacturer="Panasonic Electronic Components", Operating Temperature="-55°C ~ 155°C", Power (Watts)="0.2W, 1/5W", Ratings=AEC-Q200, Supplier Device Package=0402, Supplier Part Number 1=P124546CT-ND, Temperature Coefficient=±200ppm/°C, Tolerance=±5%, ComponentLink1Description=Datasheet, ComponentLink1URL=https://industrial.panasonic.com/cdbs/www-data/pdf/RDO0000/AOA0000C331.pdf, ComponentLink2Description="DigiKey Link", ComponentLink2URL=http://digikey.com/product-detail/en/panasonic-electronic-components/ERJ-PA2J204X/P124546CT-ND/10284816, Composition="Thick Film", Features="Automotive AEC-Q200, Pulse Withstanding", Height - Seated (Max)="0.016\" (0.40mm)", LastUpdated="9/2/2020 1:07:33 AM", Lifecycle Status=Active, Minimum Order=1, Number of Terminations=2, Package / Case="0402 (1005 Metric)", Packaging=TapeAndReel, Part Number=ERJ-PA2J204X, Part Status=Active, PartId=18890, Price=0.01, Resistance="200 kOhms", Series=ERJ, Size / Dimension="0.039\" L x 0.022\" W (1.00mm x 0.55mm)", Supplier 1=DigiKey
R8 R9 R10: library part ASC0402-10KF1, "RES 10 KOHM 1% 1/16W 0402", Device Package="0402 (1005 Metric)", Manufacturer=Riedon, Operating Temperature="-55°C ~ 155°C", Power (Watts)="0.063W, 1/16W", Ratings=AEC-Q200, Supplier Device Package=0402, Supplier Part Number 1=696-1775-1-ND, Temperature Coefficient=±100ppm/°C, Tolerance=±1%, ComponentLink1Description=Datasheet, ComponentLink1URL=https://riedon.com/media/pdf/ASC.pdf, ComponentLink2Description="DigiKey Link", ComponentLink2URL=http://digikey.com/product-detail/en/riedon/ASC0402-10KF1/696-1775-1-ND/7398745, Composition="Thick Film", Features="Anti-Sulfur, Automotive AEC-Q200, Moisture Resistant", Height - Seated (Max)="0.016\" (0.40mm)", LastUpdated="9/2/2020 1:07:48 AM", Lifecycle Status=Active, Minimum Order=1, Number of Terminations=2, Package / Case="0402 (1005 Metric)", Packaging=TapeAndReel, Part Number=ASC0402-10KF1, Part Status=Active, PartId=12809, Price=0.01, Resistance="10 kOhms", Series=ASC, Size / Dimension="0.039\" L x 0.020\" W (1.00mm x 0.50mm)", Supplier 1=DigiKey
S1: "SWITCH TACTILE SPST-NO 50MA 32V", Contact Rating @ Voltage="0.05A @ 32VDC", Manufacturer=C&K, Operating Force=400gf, Operating Temperature="-40°C ~ 85°C", Supplier Part Number 1=CKN10688CT-ND, Actuator Height off PCB, Vertical=2.50mm, Actuator Orientation="Top Actuated", Actuator Type=Standard, Circuit=SPST-NO, ComponentLink1Description=Datasheet, ComponentLink1URL=https://dznh3ojzb2azq.cloudfront.net/products/Tactile/KMR7/documents/datasheet.pdf, ComponentLink2Description="DigiKey Link", ComponentLink2URL=http://digikey.com/product-detail/en/c-k/KMR741NG-ULC-LFS/CKN10688CT-ND/6035360, Illumination=Non-Illuminated, Ingress Protection="IP67 - Dust Tight, Waterproof", LastUpdated="4/9/2020 10:01:05 AM", Lifecycle Status=Active, Minimum Order=1, Mounting Type="Surface Mount", Outline="4.20mm x 2.80mm", Packaging=TapeAndReel, Part Number="KMR741NG ULC LFS", Part Status=Active, Price=0.16, Series=KMR7, Supplier 1=DigiKey, Switch Function=Off-Mom, Termination Style="Gull Wing"

## Via types
v1: diameter 0.5, hole 0.25, Top Layer to Bottom Layer, tented both sides, 38 vias
v2: diameter 0.5, hole 0.25, Top Layer to Bottom Layer, 10 vias
v3: diameter 0.8, hole 0.4, Top Layer to Bottom Layer, tented both sides, 4 vias

## Nets (pads, with @x,y where several pads share a name; then routed paths per layer and width w, separated by ;. In a path a pad name is that pad's centre, name@x,y a point inside that pad or via, vN(x,y) a via of type N, cw(c..) or ccw(c..) an arc to the next point about the centre after c; other vN are vias at no path point)
3V3: C1.2 C2.2 C5.2 IC1.12 IC1.15 IC4.2 J3.4 | length 19.3
  Top Layer w0.3: J3.4@156.05,27.15 156.05,27.155 156.775,27.88 v1(156.775,27.934) ; v1(158.95,32.05) 158.938,32.038 158.162,32.038 C5.2 158.15,33.048 158.4,33.298 159.676,33.298 159.727,33.349 ; IC1.15 159.775,33.397 159.727,33.349 ; C2.2 C1.2 161.96,36.005 161.725,35.77 161.725,33.5 161.043,32.818 160.507,32.818 159.976,33.349 159.727,33.349
  Bottom Layer w0.3: v1(156.775,27.934) 157.695,28.855 158.461,28.855 159.557,29.951 159.557,30.004 160.334,30.781 160.334,30.95 160.383,30.999 160.383,31.454 159.787,32.05 v1(158.95,32.05)
5V0: C6.2 D1.2 D4.2 IC2.3 IC4.3 J2.1 | length 16.1
  Top Layer w0.135: D1.2@151.31,30.425 D1.2
  Top Layer w0.18: D4.2 156.15,29.725 157.3,28.575 J2.1
  Top Layer w0.3: IC2.3 151.31,30.425 D1.2 ; D1.2@151.4,30.385 151.839,30.824 151.839,30.938 152.051,31.15 v1(153.4,31.15) ; v1(155.75,30.75) 155.75,30.696 155.9,30.546 155.9,30.463 155.95,30.413 155.95,30.225 156.15,30.025 D4.2 ; v1(156.25,34.7) 156.95,34.7 157.132,34.882 IC4.3@157.132,34.932
  Top Layer w0.5: IC4.3@157.132,34.932 IC4.3 157.335,35.135 157.335,36 C6.2
  Bottom Layer w0.3: v1(155.75,30.75) 154.775,30.75 154.375,31.15 v1(153.4,31.15) 153.438,31.188 153.438,31.888 v1(156.25,34.7)
B2: IC6.3 R4.1 | length 14.5
  Top Layer w0.3: v3(164.534,28.834) 164.563,28.804 165.346,28.804 R4.1 ; IC6.3 166.795,35.15 166.875,35.07 166.875,34.732 167.014,34.593 v1(167.014,34.539)
  Bottom Layer w0.3: v3(164.534,28.834) 167.949,28.834 169.45,30.335 169.45,33.928 167.953,35.425 167.497,35.425 167.052,34.98 167.052,34.577 v1(167.014,34.539)
BATT: C3.2 D2.2 D3.4 D6.2 IC2.6 J1.1 L1.1 R1.2 S1.1 S1.2 | length 38.4
  Top Layer w0.3: IC2.6@148.25,29.125 IC2.6 ; J1.1@152.1,31.95 152.225,31.825 154.1,31.825 154.15,31.875 154.3,31.875 154.4,31.975 155.049,31.975 155.149,32.075 v1(155.203,32.075) ; v1@155.24,32.092 155.295,32.037 155.316,32.037 156.35,31.003 156.35,30.701 156.676,30.375 156.7,30.375 157.1,29.975 R1.2 ; v1(159.833,31.227) 162.092,31.227 v1(162.221,31.097) ; v3(167.35,31.025) 167.215,31.025 167.065,30.875 166.775,30.875 D3.4 166.989,30.511 167.013,30.511 167.55,29.974 167.55,29.875 167.85,29.575 S1.1 S1.2
  Top Layer w0.4: v1(146.006,27.495) 146.009,27.491 146.629,27.491 v1(146.632,27.488) 146.638,27.482 147.301,27.482 v1(147.307,27.476) ; v2(148.275,32.942) 148.275,32.925 148.6,32.6 149.78,32.6 150.305,33.125 151.395,33.125 151.9,32.62 151.9,32.325 J1.1@151.961,32.264
  Top Layer w0.5: J1.1@151.961,32.264 J1.1
  Bottom Layer w0.3: v1(155.203,32.075) 155.24,32.112 155.888,32.112 156.075,31.925 157.125,31.925 157.55,31.5 159.559,31.5 v1(159.833,31.227) ; v1(162.221,31.097) 162.257,31.061 167.314,31.061 v3(167.35,31.025)
  Bottom Layer w0.4: v1(146.632,27.488) 146.632,29.5 146.365,29.767 146.365,31.751 147.537,32.923 148.256,32.923 v2(148.275,32.942)
BLUE: IC1.10 IC6.1 R9.2 | length 23.5
  Top Layer w0.3: v2(145.85,35.99) 145.893,35.947 146.275,35.947 146.507,35.715 R9.2 ; IC1.10 163.025,35.127 163.073,35.175 163.073,35.267 v1(163.111,35.305) ; v1(165.8,35.525) 165.8,36.017 165.929,36.146 166.696,36.146 IC6.1
  Bottom Layer w0.2: v2(145.85,35.99) 153.887,35.99 154.138,36.241 160.569,36.241 161.505,35.305 v1(163.111,35.305) 165.499,35.305 165.719,35.525 v1(165.8,35.525)
BTN: C8.2 D9.1 IC1.1 R6.2 S1.3 S1.4 | length 19.8
  Top Layer w0.135: D9.1@169.56,28.45 D9.1
  Top Layer w0.2: IC1.1 159.125,29.277 159.144,29.296 159.144,29.558 159.849,30.262 160.374,30.262 160.565,30.071 161.091,30.071 161.271,30.251 163.274,30.251 v1(163.4,30.125)
  Top Layer w0.3: C8.2@168.675,34.735 168.682,34.742 169.617,34.742 R6.2 169.625,33.8 S1.4 S1.3 ; v3(168.75,30.625) 168.846,30.529 168.846,30.179 169.45,29.575 S1.3 ; D9.1@169.5,28.45 S1.3
  Bottom Layer w0.3: v1(163.4,30.125) 168.115,30.125 168.615,30.625 v3(168.75,30.625)
EN: D5.1 IC1.5 | length 4.7
  Top Layer w0.3: v2(161.483,29.751) 161.521,29.713 161.521,29.481 161.725,29.277 IC1.5 ; v1(162.833,27.376) 162.857,27.401 163.451,27.401 D5.1
  Bottom Layer w0.3: v2(161.483,29.751) 161.483,28.726 v1(162.833,27.376)
"FAN CTRL": IC1.3 IC5.1 | length 9.8
  Top Layer w0.3: IC5.1 154.475,30.45 155.187,31.162 155.187,31.312 v1(155.225,31.35) ; v1(159.125,30.35) 159.3,30.35 159.625,30.675 160.596,30.675 160.665,30.606 160.849,30.606 v1(160.884,30.571) ; v2(160.107,29.762) 160.107,29.708 160.406,29.409 160.406,28.794 IC1.3
  Bottom Layer w0.3: v1(155.225,31.35) 156.988,31.35 157.988,30.35 v1(159.125,30.35) ; v2(160.107,29.762) 160.107,29.778 160.884,30.555 v1(160.884,30.571)
G: D3.3 R5.2 | length 1.6
  Top Layer w0.3: D3.3 165.85,31.351 166.35,31.851 166.35,31.875 166.5,32.025 R5.2
G2: IC3.6 R5.1 | length 3
  Top Layer w0.3: R5.1 165.5,32.025 165.65,32.175 165.65,34.124 165.876,34.35 166.1,34.35 166.2,34.45 IC3.6
GND: C1.1 C2.1 C3.1 C4.1 C5.1 C6.1 C7.1 C8.1 D2.1 D6.1 IC1.13 IC2.1 IC2.7 IC3.1 IC3.4 IC4.1 IC5.2 IC6.2 J1.2 J1.MP1 J1.MP2 J3.5 R2.1 R6.1 R8.1 R9.1 R10.1 | length 66.8
  Top Layer w0.135: R8.1 146.081,31.815 146.661,31.235 147.803,31.235 147.995,31.427 148.75,31.427 v1@148.766,31.443
  Top Layer w0.3: R8.1@146.001,31.82 146.001,32.841 R10.1 145.996,33.903 146.507,34.415 R9.1 ; IC2.7 149.514,29.561 149.514,28.578 v1(149.552,28.54) 149.552,28.486 149.4,28.333 149.4,27.76 C3.1 149.255,27.605 150.465,27.605 C4.1 150.47,27.58 C4.1@150.32,27.43 ; v1@149.563,28.563 149.573,28.573 150.18,28.573 v1(150.204,28.596) ; v1@150.225,28.575 150.25,28.6 150.25,29.125 IC2.1 ; J1.2@150.887,31.875 150.887,31.137 v1(150.925,31.1) ; v1(152.425,29.5) 152.463,29.538 152.463,30.288 IC5.2 ; v1(153.075,32.375) 153.101,32.375 153.351,32.625 D2.1 155.196,32.625 155.396,32.825 156.075,32.825 IC4.1 156.25,32.95 157.005,32.195 157.12,32.195 C5.1@157.27,32.045 ; C5.1 C5.1@157.27,32.045 ; C6.1 158.265,35.316 158.443,35.138 v1@158.456,35.138 ; v1(158.443,35.041) 158.443,34.987 157.981,34.524 157.981,34.333 157.27,33.622 157.27,32.195 C5.1@157.27,32.045 ; v1@158.456,35.042 v1@158.456,35.138 ; C2.1 159.995,36.005 159.845,35.855 159.825,35.855 159.57,35.6 158.918,35.6 v1@158.456,35.138 ; C1.1 162.865,36 164.375,36 v3(164.4,35.975) v3@164.425,35.95 ; IC3.1 164.425,34.475 v3@164.425,35.95 ; v1(165.104,34.187) 165.104,35.271 v3@164.425,35.95 ; v1(165.6,27.325) 165.612,27.313 166.297,27.313 C7.1 ; IC3.4 166.288,33.113 166.937,33.113 v1(166.975,33.075) ; v1(167.725,34.875) 167.738,34.887 167.738,35.638 IC6.2 167.768,35.632 168.657,35.632 168.675,35.615 168.695,35.615 168.98,35.9 R6.1
  Top Layer w0.4: R8.1@146.001,31.82 R8.1@146.076,31.82 ; D6.1 148.766,31.9 v1@148.766,31.443 ; D6.1@149.042,31.875 J1.2@150.85,31.875
  Bottom Layer w0.3: v1(150.204,28.596) 150.729,28.596 152.2,27.125 153.352,27.125 J3.5@153.38,27.097 ; v1(150.925,31.1) v1@152.425,29.6 ; v1(152.425,29.5) v1@152.425,29.6 ; v1@152.607,29.372 158.2,29.372 v1(158.233,29.405) ; v1(153.075,32.375) 152.425,31.725 v1@152.425,29.6 ; v1(158.443,35.041) 158.482,35.079 158.824,35.079 158.828,35.084 159.985,33.927 160.954,33.927 160.996,33.885 161.137,33.885 v1(161.174,33.847) ; 161.285,33.45 161.285,33.14 161.101,32.957 161.101,32.413 161.671,31.843 161.671,30.869 162.94,29.601 162.94,29.438 164.503,27.875 165.05,27.875 v1(165.6,27.325) ; v1(165.104,34.187) 166.216,33.075 v1(166.975,33.075) 167.725,33.825 v1(167.725,34.875)
  other v1: 148.782,31.427
GREEN: IC1.9 IC3.2 R10.2 | length 22.1
  Top Layer w0.135: v2(146.764,33.523) 146.833,33.453 146.833,33.158 146.838,33.153 146.838,33.078 147.071,32.846 R10.2
  Top Layer w0.3: v2(162.441,33.14) 163.395,33.14 164.002,33.747 164.397,33.747 IC3.2 164.4,33.85 164.002,33.85 163.675,34.177 IC1.9
  Bottom Layer w0.2: v2(146.764,33.523) 147.712,34.471 155.123,34.471 156.193,35.541 160.187,35.541 161.674,34.054 161.674,33.907 v2(162.441,33.14)
MONITOR: IC1.14 R1.1 R2.2 | length 6.6
  Top Layer w0.3: R1.1 157.125,31.075 158.125,31.075 R2.2 158.262,30.988 158.837,30.988 v1(158.875,30.95) 158.875,31.047 159.808,31.979 v1(159.808,32.652) ; IC1.14 160.444,34.606 160.444,33.713 160.735,33.422 v2(160.735,33.368)
  Bottom Layer w0.3: v1(159.808,32.652) 159.862,32.652 160.54,33.33 160.696,33.33 v2(160.735,33.368)
NetC4_2: C4.2 D1.1 IC2.2 | length 3
  Top Layer w0.3: IC2.2 150.35,29.775 151.01,29.115 151.2,29.115 D1.1 C4.2 C4.2@151.5,27.75
NetC7_2: C7.2 D5.2 IC2.4 R7.2 | length 25.3
  Top Layer w0.3: IC2.4 148.4,30.425 148.555,30.58 148.555,30.699 148.731,30.875 149.277,30.875 149.378,30.977 v1(149.432,30.977) ; v1(164.175,27.33) 164.213,27.368 164.838,27.368 D5.2 164.895,27.475 165.395,27.975 166.95,27.975 167.04,27.885 167.04,27.45 C7.2 167.228,27.337 168.262,27.337 R7.2@168.3,27.375
  Bottom Layer w0.2: v1(149.432,30.977) 152.689,27.72 156.242,27.72 156.528,27.434 157.086,27.434 158.107,28.455 159.506,28.455 160.607,29.555 160.607,29.582 161.276,30.251 161.69,30.251 162.54,29.402 162.54,28.965 v1(164.175,27.33)
NetD3_1: D3.1 R4.2 | length 1.3
  Top Layer w0.3: R4.2 166.55,28.775 166.7,28.925 D3.1
NetD4_1: D4.1 IC5.3 J2.2 | length 4
  Top Layer w0.3: IC5.3 153.7,28.575 J2.2 155.975,28.73 155.45,29.255 D4.1
NetD9_2: D9.2 R7.1 | length 1.8
  Top Layer w0.3: D9.2@168.105,28.425 168.105,28.375 168.505,27.975 168.799,27.975 169.225,27.549 169.225,27.525 169.375,27.375 R7.1@169.45,27.375
NetIC2_5: IC2.5 L1.2 | length 2
  Top Layer w0.3: L1.2@146.7,30.6 146.85,30.45 147.575,30.45 148.25,29.775 IC2.5
R: D3.2 R3.2 | length 1.2
  Top Layer w0.3: R3.2 164.675,29.925 165.825,29.925 D3.2
R2: IC3.3 R3.1 | length 2.2
  Top Layer w0.3: IC3.3 164.45,32.337 164.65,32.137 R3.1
RED: IC1.11 IC3.5 R8.2 | length 23.8
  Top Layer w0.135: R8.2 147.388,32.048 147.835,32.048 v2(147.874,32.087)
  Top Layer w0.3: v2(149.916,33.922) 150.679,34.685 150.679,34.933 v2(150.718,34.971) ; IC3.5 166.263,33.787 v1@166.882,33.787
  Bottom Layer w0.2: v2(147.874,32.087) 147.94,32.087 148.296,32.442 148.482,32.442 149.916,33.876 v2(149.916,33.922) ; v2(150.718,34.971) 155.129,34.971 156.048,35.891 160.424,35.891 162.44,33.875 v1(162.475,33.875) 163.287,34.687 165.982,34.687 v1(166.896,33.773)
RST: IC1.4 J3.3 | length 3.8
  Top Layer w0.3: J3.3@158.234,27.097 158.907,27.77 160.602,27.77 161.056,28.224 161.056,28.756 IC1.4
SWCLK: IC1.6 J3.2 | length 3.2
  Top Layer w0.145: IC1.6@162.375,28.3 IC1.6
  Top Layer w0.2: J3.2@160.184,27.047 160.34,27.047 160.663,27.37 160.842,27.37 161.192,27.72 161.795,27.72 IC1.6@162.375,28.3
SWDIO: IC1.7 J3.1 | length 2.2
  Top Layer w0.2: J3.1@162.184,27.047 162.085,27.146 162.085,27.336 162.626,27.876 162.655,27.876 163.025,28.246 IC1.7
pads on no net: IC1.2 IC1.8 IC1.16

## Polygon pours and split planes (outlines as drawn)
GND on Top Layer "GND_L01_P003" (solid, remove dead copper, pour order 3): 145.307,36.67 145.307,26.67 170.307,26.67 170.307,36.67
NetIC2_5 on Top Layer "NETIC2_5_L01_P001" (solid, remove dead copper, pour order 1): 148.525,29.625 147.95,29.625 145.575,29.625 145.575,30.99 147.85,30.99 147.85,30.4 148.225,30.025 148.525,30.025
BATT on Top Layer "BATT_L01_P002" (solid, remove dead copper, pour order 2): 148.512,29.325 145.663,29.325 145.663,27.025 147.838,27.025 148.512,27.025 148.512,28.325
GND on Bottom Layer "GND_L02_P000" (solid, remove dead copper, pour order 0): 145.307,36.67 145.307,26.67 170.307,26.67 170.307,36.67

## Keep-outs
Keep-Out Layer:
  the board outline again, w0.254

## Other copper
Top Layer:
  region: 159.125,28.775
  region: 150.275,29.775

## Silkscreen, mask and mechanical layers (free items; w line width, h text height)
Mechanical 1:
  lines w0.254: 145.307,31.67 170.307,31.67 170.307,36.67 ; 145.307,36.67 157.807,36.67
Mechanical 15:
  lines w0.254: 145.307,33.795 158.057,33.795 ; 151.682,30.92 151.682,36.67 ; 145.307,30.92 145.307,36.67 158.057,36.67 158.057,30.92 145.307,30.92